# Altium PCB PCB1.PcbDoc
Units mm, origin at the board's own origin, x right, y up, seen from the top; angles counter-clockwise.
Board outline 60 x 50 mm, 2 copper layers (Top Layer, Bottom Layer); 12 components, 8 nets, 52 pads, 0 vias.
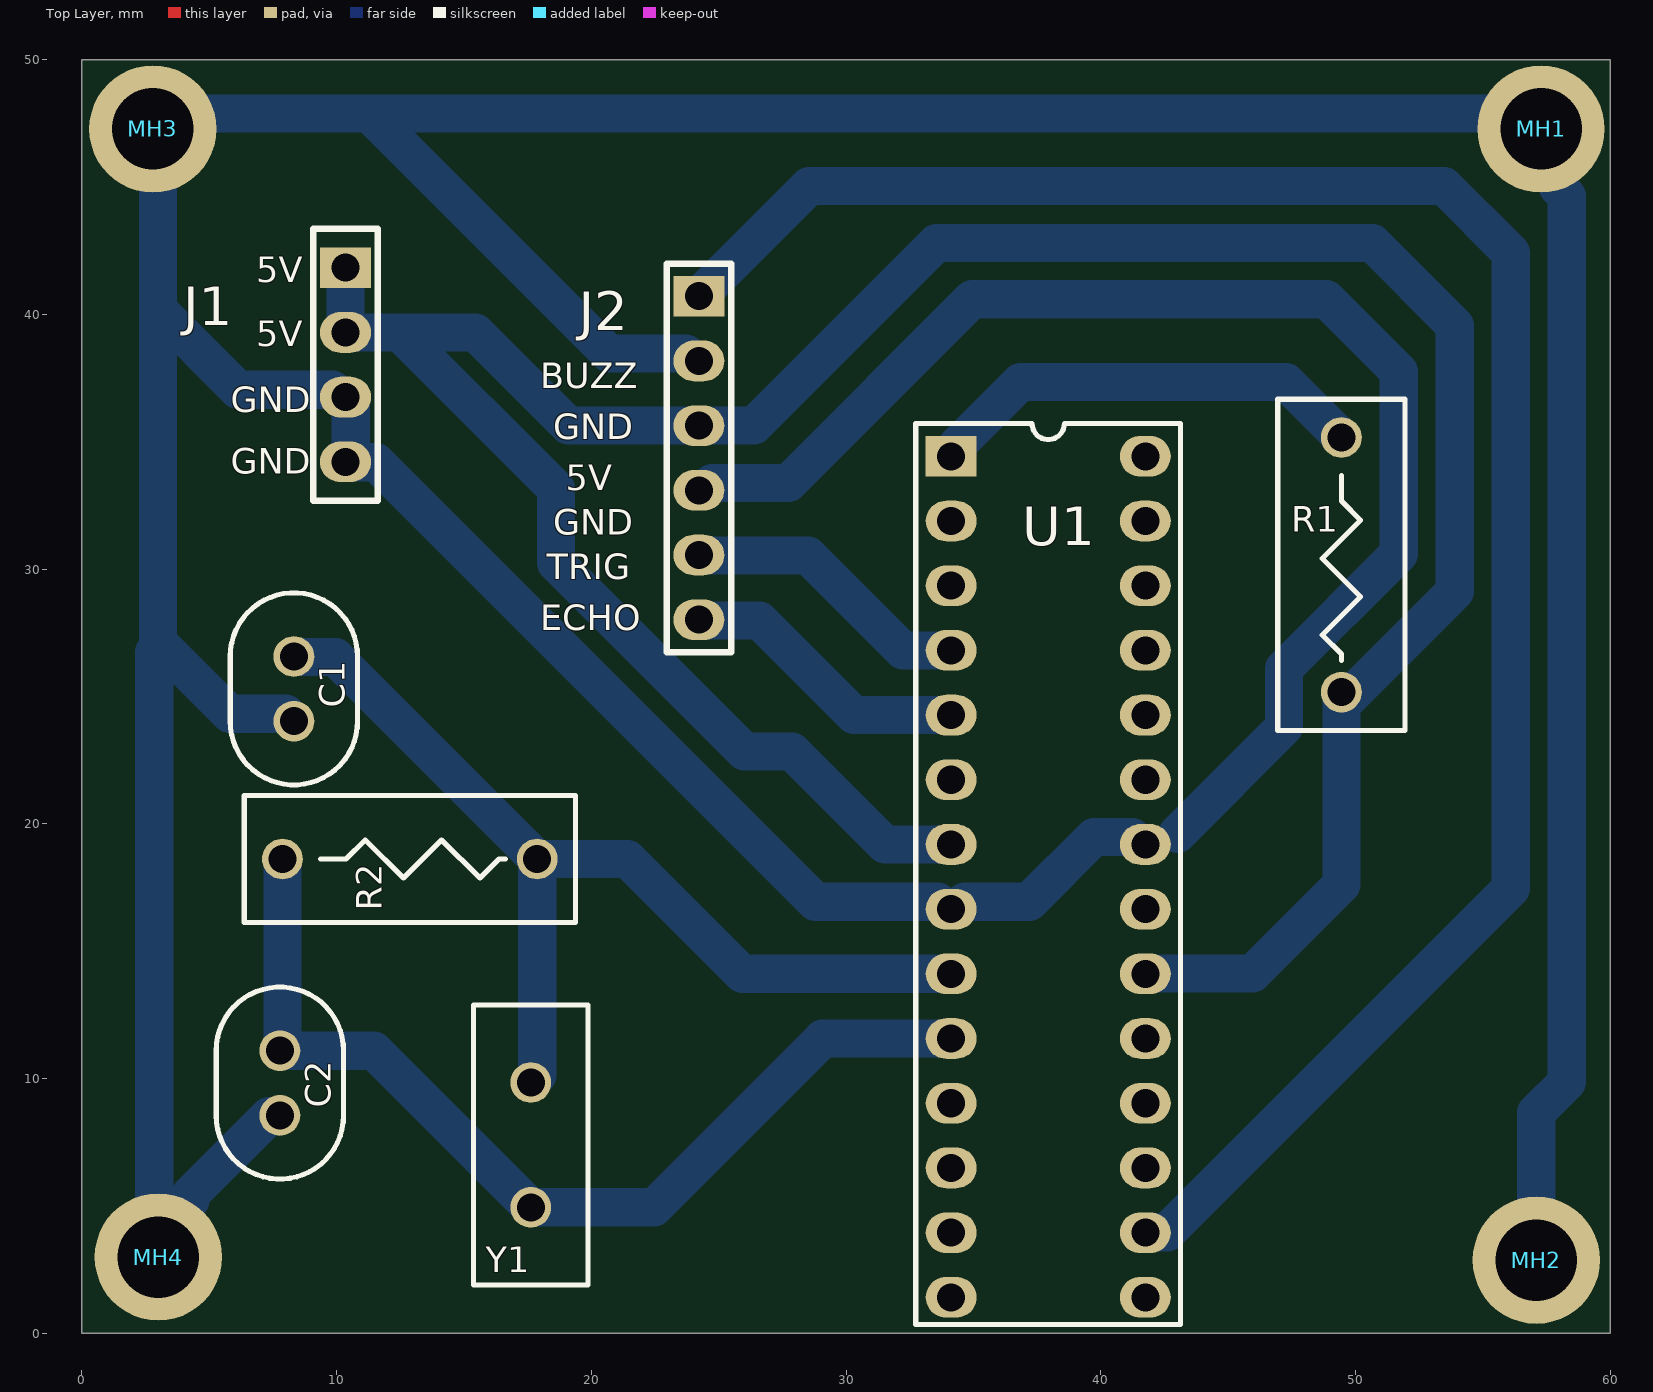
[diagram p0: Top Layer view]
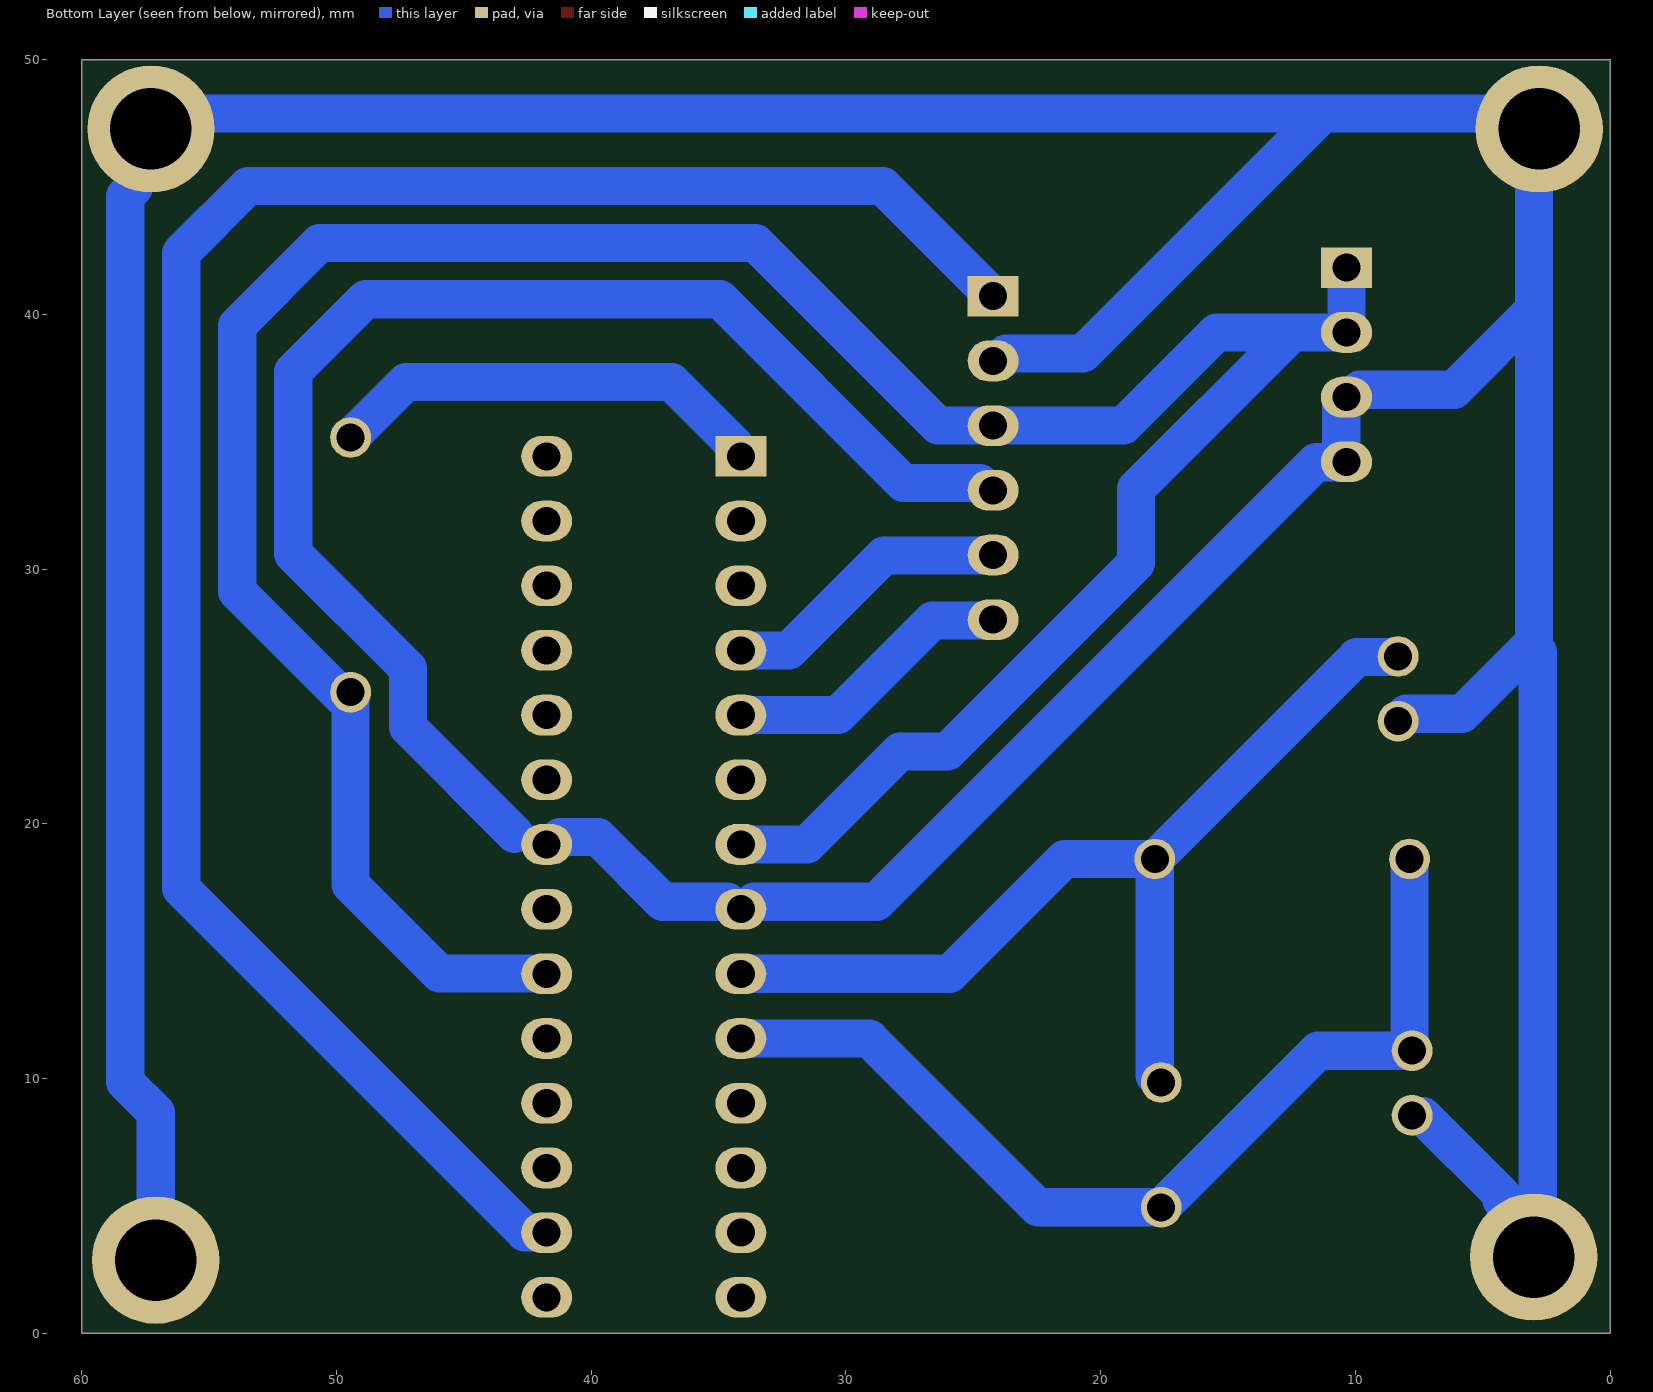
[diagram p1: Bottom Layer view, seen from below]
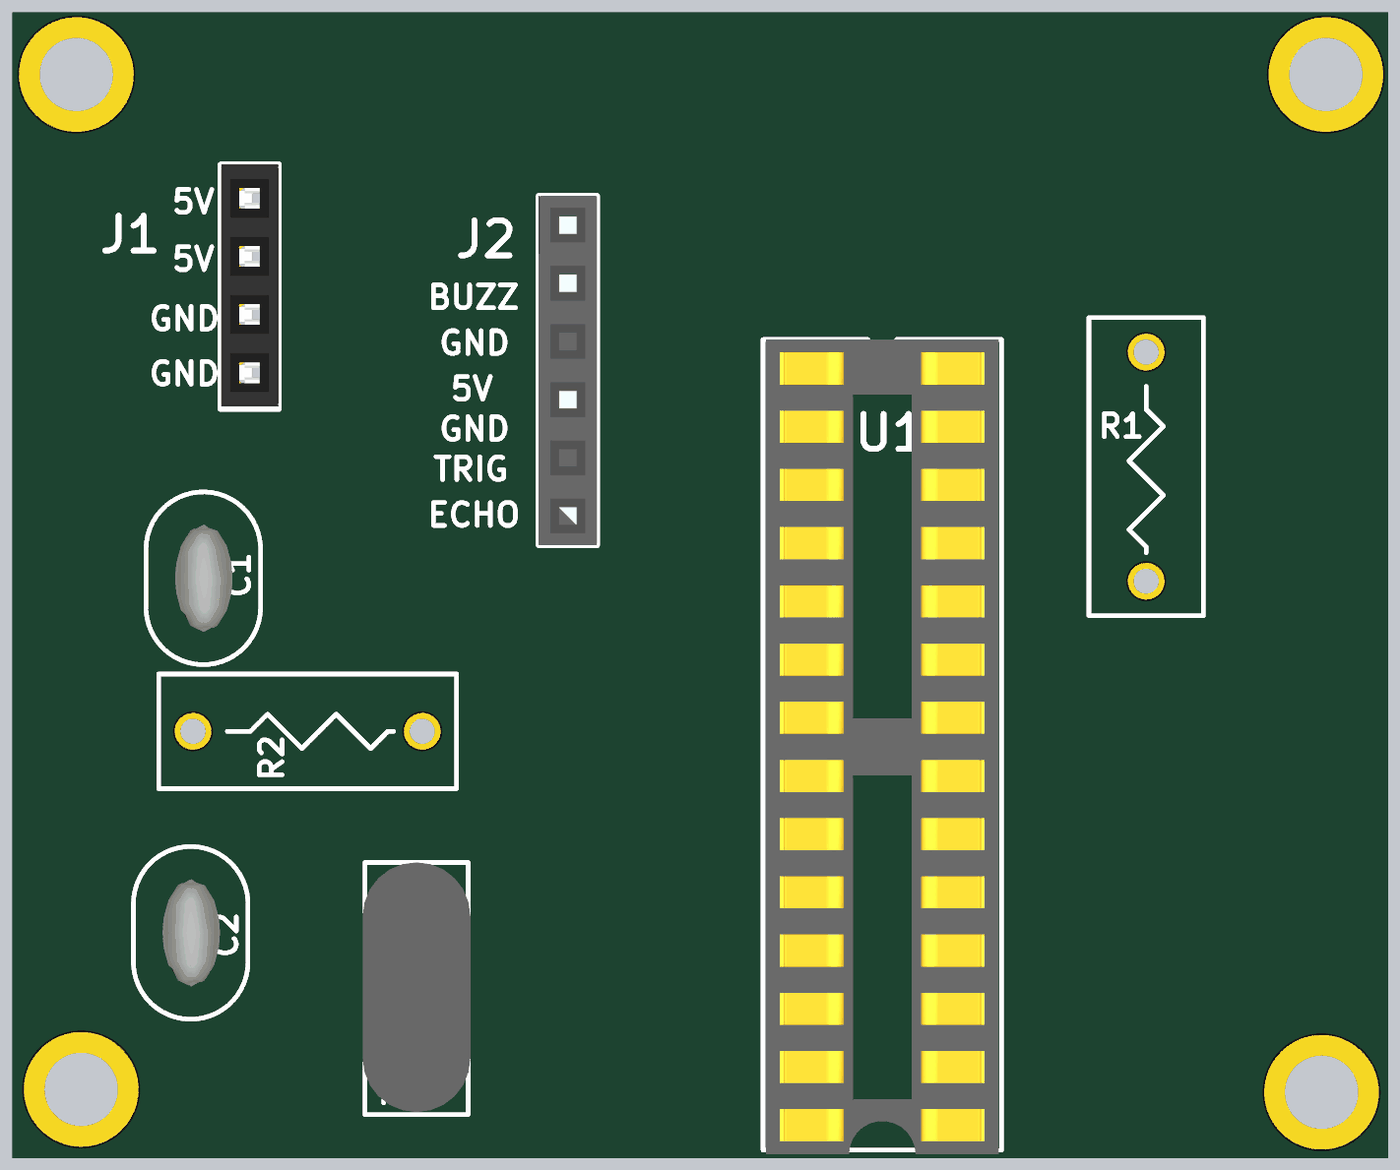
[diagram p2: 3D render of the assembled board from above, using the file's embedded part models]

## Layer stack, top to bottom
Top Solder: solder mask 0.0102, Solder Resist, Dk 3.5
Top Layer: signal copper 0.0356
Dielectric 1: dielectric 0.32, FR-4, Dk 4.8
Bottom Layer: signal copper 0.0356
Bottom Solder: solder mask 0.0102, Solder Resist, Dk 3.5

## Board outline
0,0 60,0 60,50 0,50

## Design rules (kind name [scope] priority, off if disabled: settings)
BoardOutlineClearance [All] p1: gap=0.2 ignorepadtopadclearanceinfootprint=FALSE
Clearance [All] p1: gap=0.7 ignorepadtopadclearanceinfootprint=FALSE
ComponentClearance [All] p1: gap=0.127 collisioncheckmode=3 verticalgap=0.127 showdistances=TRUE
DiffPairsRouting [All] p1: maxlimit=0.254 minlimit=0.127 mostfreqgap=0.127 toplayer_minwidth=0.127 toplayer_maxwidth=25.4 toplayer_prefwidth=0.127 bottomlayer_minwidth=0.127 bottomlayer_maxwidth=25.4 bottomlayer_prefwidth=0.127 maxuncoupledlength=12.7
Height [All] p1: minheight=0 maxheight=1816.048 prefheight=12.7
HoleSize [All] p1: absolutevalues=TRUE maxlimit=6.3 minlimit=0.3 maxpercent=80.000 minpercent=20.000
HoleToHoleClearance [All] p1: gap=0.25 allowstackedmicrovias=FALSE
MinimumAnnularRing [All] p1: minimumring=0.076
MinimumSolderMaskSliver [All] p1: minsoldermaskwidth=0
PlaneClearance [All] p1: clearance=0.7
PlaneConnect PlaneConnectPowerPads [InPadClass('PowerPads')] p1: planeconnectstyle=Direct reliefexpansion=0.508 reliefentries=4 reliefconductorwidth=0.254 reliefairgap=0.254
PlaneConnect [All] p2: planeconnectstyle=Direct reliefexpansion=0.3 reliefentries=4 reliefconductorwidth=0.127 reliefairgap=0.127
PolygonConnect PolygonConnectPowerPads [All vs (InPadClass('PowerPads'))] p1: connectstyle=Direct reliefconductorwidth=0.254 reliefentries=4 polygonreliefangle="90 Angle" airgapwidth=0.254
PolygonConnect [All] p2: connectstyle=Direct reliefconductorwidth=0.127 reliefentries=4 polygonreliefangle="90 Angle" airgapwidth=0.127
RoutingVias [All] p1: holewidth=0.3 width=0.6 viastyle="Through Hole" minholewidth=0.3 minwidth=0.6 maxholewidth=0.6 maxwidth=6.6
SilkToSilkClearance [All] p1: silktosilkclearance=0
SilkToSolderMaskClearance [IsPad] p1: minsilkscreentomaskgap=0.127 clearancetoexposedcopper=TRUE
SolderMaskExpansion [All] p1: expansion=0.075 istentingtop=FALSE
Width [All] p1: maxlimit=25.4 minlimit=1.5 preferedwidth=1.5 minimp=50.000000 maximp=50.000000 favimp=50.000000
20 further rules are at their usual default settings.

## Classes and differential pairs
component class Sheet1: C1 J1 J2 MH1 MH2 MH3 MH4 R1 R2 U1 Y1

## Components (designator, comment, footprint, x,y, rotation, side; value= is the part's Value field where it differs from the comment)
C1 "Capacitor" "Capacitor TH" 8.325,24.035 r90 top
C2 "Capacitor" "Capacitor TH" 7.775,8.56 r90 top
J1 "4 Pin Header, 1 Row, Female, 2.54mm Pitch" "4 Pin Header" 10.35,41.84 r0 top
J2 "6 Pin Header" "6 PIN HEADER" 24.225,40.72 r0 top
MH1 "Mounting Hole" "Mounting Hole" 57.288,47.288 r0 top
MH2 "Mounting Hole" "Mounting Hole" 57.1,2.875 r0 top
MH3 "Mounting Hole" "Mounting Hole" 2.788,47.288 r0 top
MH4 "Mounting Hole" "Mounting Hole" 3,3 r0 top
R1 "Resistor" Resistor 49.45,35.175 r270 top
R2 "Resistor" Resistor 7.875,18.625 r0 top
U1 "TH_IC SOCKET" 28dip_through_hole_ic_socket 34.13,34.437 r0 top
Y1 "Crystal" Crystal 17.625,7.4 r270 top

## Footprints (in the part's own frame and the unit in brackets; to place one, negate y for a bottom-side part, rotate by r counter-clockwise, add the part's x,y. Pads: shape width x height; smd on the part's side, far side on the other; paste and mask are expansions set on the pad)
"4 Pin Header" [mm]
  rect 2x1.6 hole 1.1: 1(0,0)
  oval 2x1.6 hole 1.1: 2(0,-2.54) 3(0,-5.08) 4(0,-7.62)
  silkscreen extent -1.27,-9.14 1.27,1.52, body extent -1.25,-9.04 1.25,1.52, height 8.51
"6 PIN HEADER" [mm]
  rect 2x1.6 hole 1.1: 1(0,0)
  oval 2x1.6 hole 1.1: 2(0,-2.54) 3(0,-5.08) 4(0,-7.62) 5(0,-10.16) 6(0,-12.7)
  silkscreen extent -1.27,-13.97 1.27,1.27, body extent -1.27,-13.97 1.27,1.27, height 8.26
28dip_through_hole_ic_socket [mm]
  rect 2x1.6 hole 1.1: 1(0,0)
  oval 2x1.6 hole 1.1: 2(0,-2.54) 3(0,-5.08) 4(0,-7.62) 5(0,-10.16) 6(0,-12.7) 7(0,-15.24) 8(0,-17.78) 9(0,-20.32) 10(0,-22.86) 11(0,-25.4) 12(0,-27.94) 13(0,-30.48) 14(0,-33.02) 15(7.62,-33.02) 16(7.62,-30.48) 17(7.62,-27.94) 18(7.62,-25.4) 19(7.62,-22.86) 20(7.62,-20.32) 21(7.62,-17.78) 22(7.62,-15.24) 23(7.62,-12.7) 24(7.62,-10.16) 25(7.62,-7.62) 26(7.62,-5.08) 27(7.62,-2.54) 28(7.62,0)
  silkscreen extent -1.39,-34.09 9.01,1.29, body extent -1.27,-34.27 8.89,1.29, height 5.15
"Capacitor TH" [mm]
  round 1.6 hole 1.1: 1(0,0) 2(2.54,0)
  silkscreen extent -2.5,-2.5 5.04,2.5, body extent -1.07,-1.28 3.63,1.22, height 6.92
Crystal [mm]
  round 1.6 hole 1.1: 1(-2.45,0) 2(2.45,0)
  silkscreen extent -5.5,-2.25 5.5,2.25, body extent -5.51,-2.35 5.39,2.35, height 4.2
"Mounting Hole" [mm]
  round 5 hole 3.2: 1(0,0)
Resistor [mm]
  round 1.6 hole 1.1: 1(0,0) 2(10,0)
  silkscreen extent -1.5,-2.5 11.5,2.5

## Part data
J1: library part M20-7820446, "4 Pin Header Board Connector, 4 Contact(s), 1 Row(s), Female, Straight, 0.1 inch Pitch, Solder Terminal, Locking, Black Insulator, Socket", Contact Resistance=20mR, Dielectric Withstanding Voltage (AC)=1kV, Flammability Rating="UL94 V-0", Insulation Color=Black, Insulation Resistance=1GR, Manufacturer=Harwin, Max Operating Temperature=105°C, Min Operating Temperature=-40°C, Rated Current (Signal)=3A, Supplier Part Number=952-1792-ND, Body Breadth=0.098inch, Body Depth=0.335inch, Body Length=0.4inch, Body/Shell Style=SOCKET, Category="Headers and Wire Housings", ComponentLink1Description=https://datasheet.ciiva.com:443/pdfs/VipMasterIC/IC/HRWN/HRWN-S-A0004894635/HRWN-S-A0004894635-1.pdf?src-supplier=IHS+Markit, ComponentLink1URL=https://datasheet.ciiva.com:443/pdfs/VipMasterIC/IC/HRWN/HRWN-S-A0004894635/HRWN-S-A0004894635-1.pdf?src-supplier=IHS+Markit, ComponentLink2Description=https://datasheet.ciiva.com/11747/0900766b80dc1d2b-11747084.pdf?src-supplier=Rs, ComponentLink2URL=https://datasheet.ciiva.com/11747/0900766b80dc1d2b-11747084.pdf?src-supplier=Rs, ComponentLink3Description=https://datasheet.ciiva.com/6784/m20-782-6784360.pdf?src-supplier=Digi-Key, ComponentLink3URL=https://datasheet.ciiva.com/6784/m20-782-6784360.pdf?src-supplier=Digi-Key, ComponentLink4Description=https://datasheet.ciiva.com/7639/1836950-7639727.pdf?src-supplier=Element14, ComponentLink4URL=https://datasheet.ciiva.com/7639/1836950-7639727.pdf?src-supplier=Element14, ComponentLink5Description=https://datasheet.ciiva.com/10151/m20-782-10151359.pdf?src-supplier=Avnet, ComponentLink5URL=https://datasheet.ciiva.com/10151/m20-782-10151359.pdf?src-supplier=Avnet, Connector Type="BOARD CONNECTOR", Contact Finish - Mating=TIN, Contact Finish - Termination=TIN, Contact Gender=Female, Contact Pattern=RECTANGULAR, Contact Style="SQ PIN-SKT", DIN Conformance=No, Durability=300Cycles, Filter Feature=No, IEC Conformance=No, Insulation Material=Polyamide, JESD-609 Code=e3, Manufacturer Part Number=M20-7820446, Mating Contact Pitch=0.1inch, MIL Conformance=No, Mixed Contacts=No, Mounting Option 1=LOCKING, Mounting Style=STRAIGHT, Mounting Technology=Board, Number Of Connectors=1, Number of Contacts=4, Number Of PCB Rows=1, Number of Rows Loaded=1, Option="General Purpose", PCB Contact Pattern=RECTANGULAR, Polarization Key="POLARIZED HOUSING", Pricing="1=1.02, 10=0.859, 100=0.771, 500=0.63084, 1000=0.56075, 5000=0.49066, 10000=0.46613 (USD)", Reach SVHC Compliant=Yes, Reference Standard=UL, Reliability=COMMERCIAL, RoHS=Yes, RoHS Compliant=Yes, Stock=3461, Supplier=Digi-Key, Terminal Length=0.118inch, Terminal Pitch=2.54mm, Termination=Solder
J2: library part 929850-01-06-RB, "6 Pin Header Board Connector", Manufacturer=3M, Manufacturer Series=929, Supplier Part Number=517-929850-01-06-RB, Category="Headers and Wire Housings", ComponentLink1Description=https://datasheet.ciiva.com:443/pdfs/VipMasterIC/IC/IIIM/IIIMS03618/IIIMS03618-1.pdf?src-supplier=IHS+Markit, ComponentLink1URL=https://datasheet.ciiva.com:443/pdfs/VipMasterIC/IC/IIIM/IIIMS03618/IIIMS03618-1.pdf?src-supplier=IHS+Markit, ComponentLink2Description=https://datasheet.ciiva.com/5148/ts0815-5148223.pdf?src-supplier=Mouser, ComponentLink2URL=https://datasheet.ciiva.com/5148/ts0815-5148223.pdf?src-supplier=Mouser, ComponentLink3Description=https://datasheet.ciiva.com/756/ts0815-756418.pdf?src-supplier=Digi-Key, ComponentLink3URL=https://datasheet.ciiva.com/756/ts0815-756418.pdf?src-supplier=Digi-Key, Connector Type="BOARD CONNECTOR", Manufacturer Part Number=929850-01-06-RB, Pricing="1=2.56, 10=2.08, 50=2.08, 100=1.99, 1000=1.42, 10000=1.26 (USD)", Reach SVHC Compliant=Yes, RoHS=Yes, RoHS Compliant=Yes, Stock=258, Supplier=Mouser
U1: library part ICS-328-T, "Through Hole IC Sockets 28P / .300\"", Manufacturer="Adam Equipment", Category="IC and Component Sockets", ComponentLink1Description=https://datasheet.ciiva.com/16210/page-187-188-16210500.pdf?src-supplier=Future+Electronics, ComponentLink1URL=https://datasheet.ciiva.com/16210/page-187-188-16210500.pdf?src-supplier=Future+Electronics, Manufacturer Part Number=ICS-328-T, Pricing="1=0.1941, 17=0.1922, 34=0.1565, 51=0.1549, 85=0.1534, 238=0.139, 442=0.1333, 952=0.1182 (USD)", RoHS=Yes, Stock=603, Supplier="Arrow Electronics", Supplier Part Number=ICS-328-T

## Nets (pads, with @x,y where several pads share a name; then routed paths per layer and width w, separated by ;. In a path a pad name is that pad's centre, name@x,y a point inside that pad or via, vN(x,y) a via of type N, cw(c..) or ccw(c..) an arc to the next point about the centre after c; other vN are vias at no path point)
+5: J1.1 J1.2 J2.3 R1.2 U1.7 U1.20 | length 116.7
  Bottom Layer w1.5: J1.1 J1.2 12.475,39.3 ; U1.7 31.526,19.197 27.874,22.849 26.014,22.849 18.613,30.25 18.613,33.162 12.475,39.3 ; U1.20 41.769,14.136 45.961,14.136 49.45,17.625 49.45,25.129 R1.2@49.464,25.142 ; R1.2@49.7,24.925 53.9,29.125 53.9,39.575 50.67,42.805 33.555,42.805 26.39,35.64 J2.3 19.108,35.64 15.448,39.3 12.475,39.3
D2: J2.5 U1.4 | length 11.5
  Bottom Layer w1.5: J2.5 24.244,30.541 28.509,30.541 32.233,26.817 U1.4
D3: J2.6 U1.5 | length 11.5
  Bottom Layer w1.5: J2.6 24.244,28.001 24.515,28.001 24.528,27.987 26.598,27.987 30.309,24.277 U1.5
D10: J2.1 U1.16 | length 79.6
  Bottom Layer w1.5: J2.1@24.425,40.72 24.475,40.77 24.475,40.97 28.555,45.05 53.475,45.05 56.1,42.425 56.1,17.465 42.611,3.976 41.769,3.976 U1.16
GND: C1.1 C2.1 J1.3 J1.4 J2.2 J2.4 MH1.1 MH2.1 MH3.1 MH4.1 U1.8 U1.22 | length 280.3
  Bottom Layer w1.5: 2.993,27.143 5.811,24.325 8.008,24.325 8.298,24.035 C1.1 ; MH4.1 2.845,3.155 2.845,26.757 2.993,26.905 2.993,40.193 ; MH4.1@3,4.185 3.238,4.185 4.266,5.213 4.266,5.451 7.356,8.541 7.756,8.541 C2.1 ; J2.4 24.452,33.1 24.742,33.39 27.74,33.39 34.955,40.605 48.855,40.605 51.7,37.761 51.7,30.607 47.2,26.107 47.2,23.805 43.015,19.62 ; J2.2 23.998,38.18 23.708,38.47 20.691,38.47 11.268,47.893 ; U1.22 41.523,19.197 41.233,19.487 39.733,19.487 37.193,16.947 34.647,16.947 34.357,16.657 33.903,16.657 33.613,16.947 28.805,16.947 11.551,34.201 10.369,34.201 J1.4 10.509,34.22 10.555,34.266 10.555,36.714 10.509,36.76 10.123,36.76 9.833,37.05 6.136,37.05 2.993,40.193 ; MH2.1 57.1,8.675 58.3,9.875 58.3,44.659 57.957,45.002 57.957,46.618 56.682,47.893 11.268,47.893 ; 2.993,40.193 2.993,47.082 MH3.1 3.393,47.893 11.268,47.893
NetC1_2: C1.2 R2.2 U1.9 Y1.1 | length 39.8
  Bottom Layer w1.5: C1.2 8.344,26.556 9.944,26.556 R2.2 ; Y1.1 17.625,9.877 17.875,10.127 R2.2 ; U1.9 25.933,14.117 21.425,18.625 R2.2
NetC2_2: C2.2 R2.1 U1.10 Y1.2 | length 39.2
  Bottom Layer w1.5: R2.1 7.875,11.227 7.775,11.127 C2.2 11.475,11.1 Y1.2 22.464,4.95 29.091,11.577 U1.10
NetR1_1: R1.1 U1.1 | length 17.7
  Bottom Layer w1.5: U1.1 34.33,34.437 34.38,34.487 34.38,34.88 36.85,37.35 47.275,37.35 R1.1
pads on no net: U1.2 U1.3 U1.6 U1.11 U1.12 U1.13 U1.14 U1.15 U1.17 U1.18 U1.19 U1.21 U1.23 U1.24 U1.25 U1.26 U1.27 U1.28

## Silkscreen, mask and mechanical layers (free items; w line width, h text height)
Top Overlay:
  text "BUZZ" at 18,37.1 h1
  text "GND" at 18.5,35.1 h1
  text "5V" at 19,33.1 h1
  text "GND" at 18.5,31.35 h1
  text "TRIG" at 18.25,29.6 h1
  text "ECHO" at 18,27.6 h1
Mechanical 1:
  the board outline again, w0.05

## Text inside footprints (layer, text, board x,y; h text height)
J1: Top Overlay "GND" at 5.85,33.76 h1; Top Overlay "GND" at 5.85,36.16 h1; Top Overlay "5V" at 6.85,38.76 h1; Top Overlay "5V" at 6.85,41.26 h1